# Altium PCB holoboard_mezzanine.PcbDoc
Units mil, origin at the board's own origin, x right, y up, seen from the top; angles counter-clockwise.
Board outline 511.81 x 511.81 mil, 2 copper layers (Top Layer, Bottom Layer); 17 components, 13 nets, 48 pads, 12 vias.
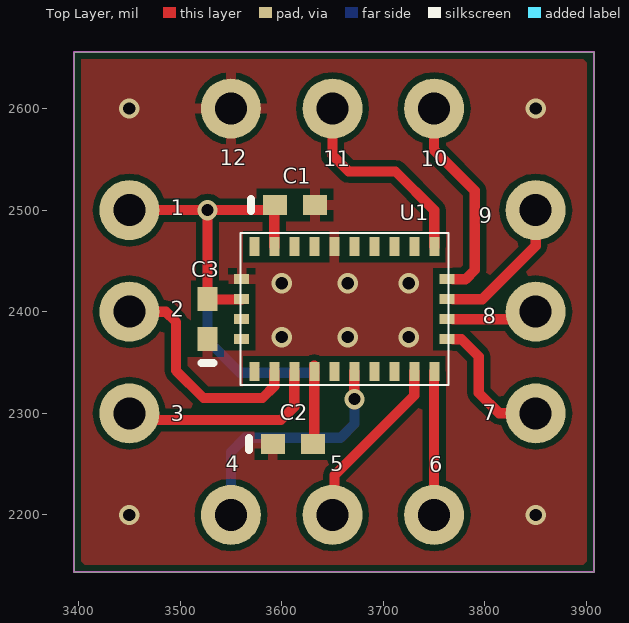
[diagram p0: Top Layer view]
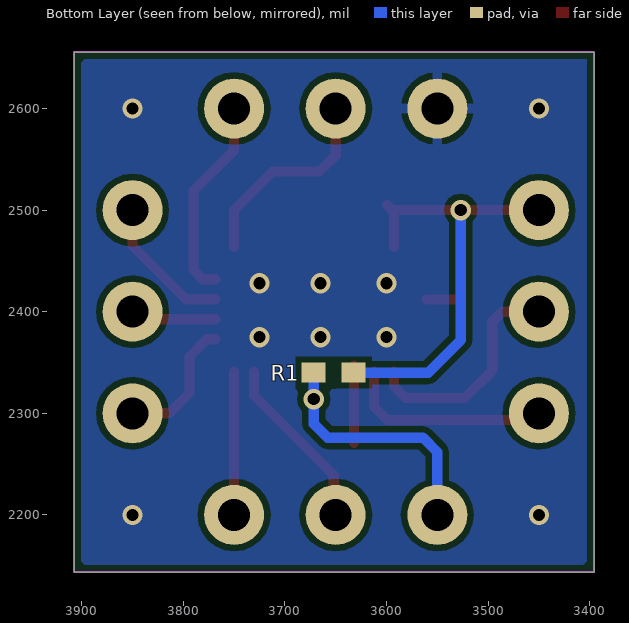
[diagram p1: Bottom Layer view, seen from below]
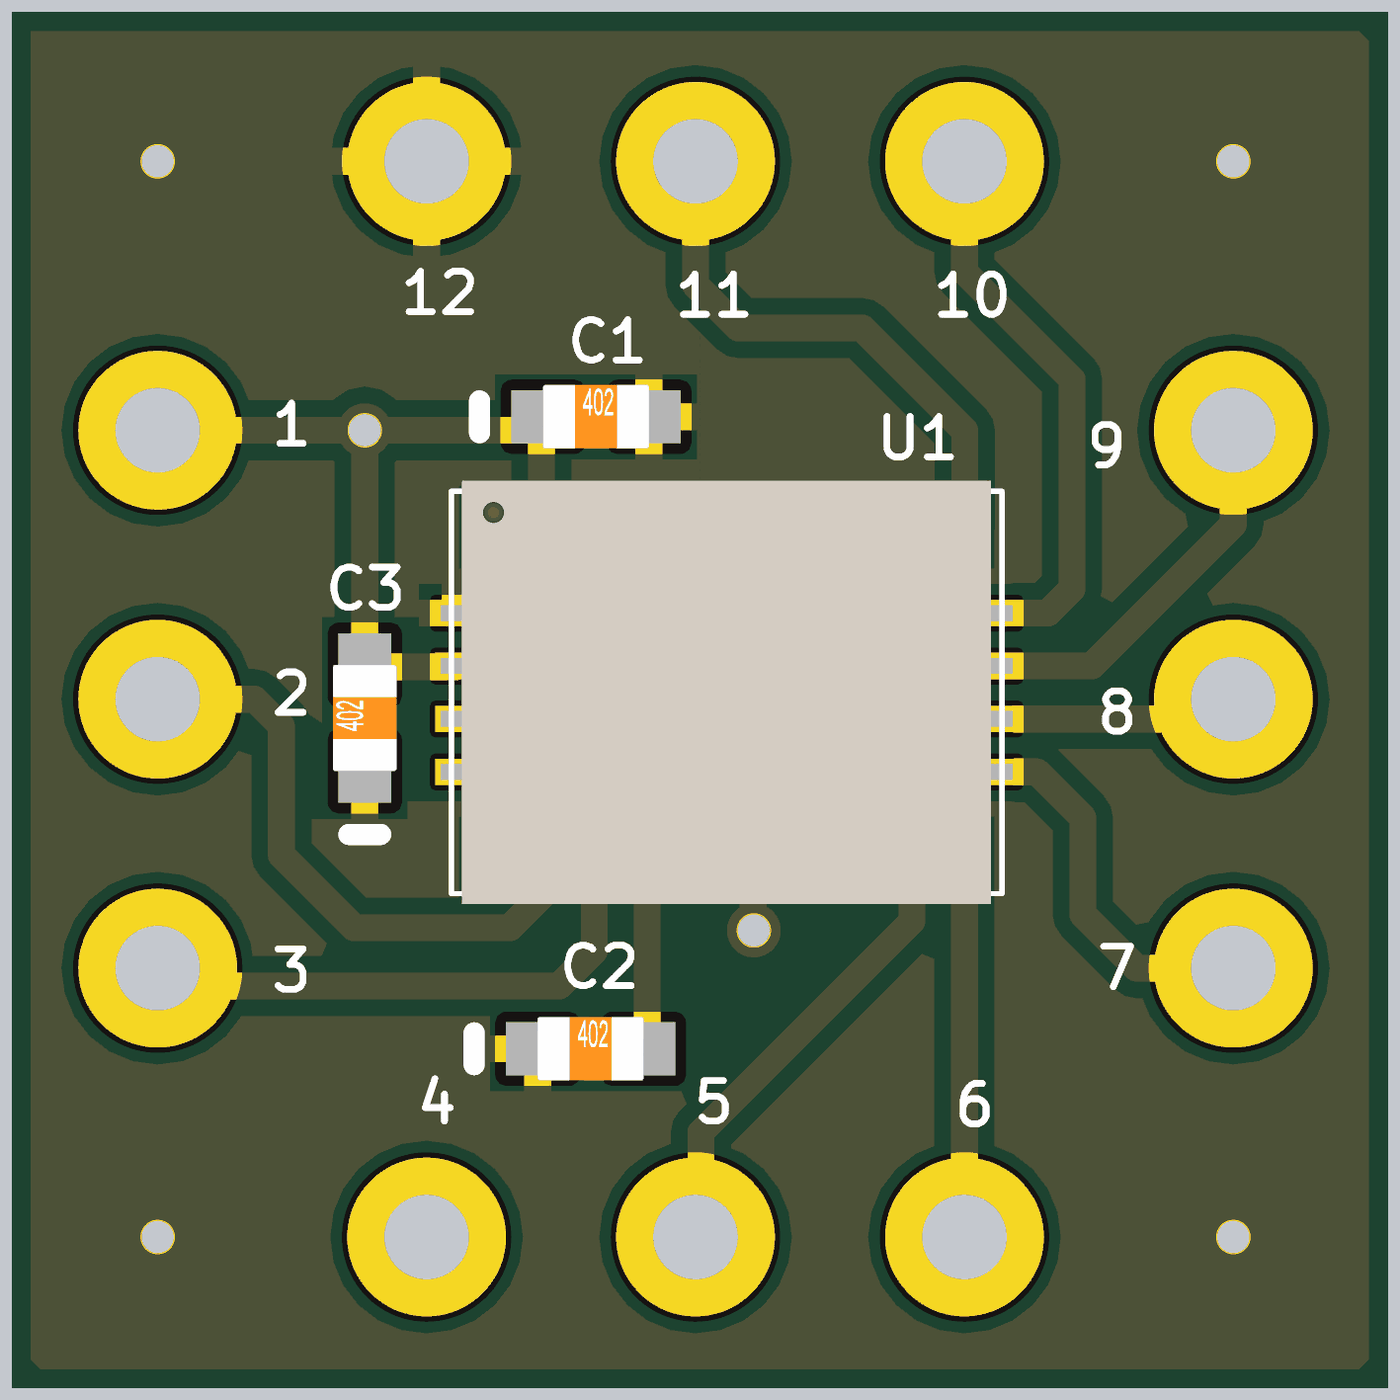
[diagram p2: 3D render of the assembled board from above, using the file's embedded part models]

## Layer stack, top to bottom
Top Layer: signal copper 1.4
Dielectric: dielectric 12.6, FR-4, Dk 4.8
Bottom Layer: signal copper 1.4

## Board outline
3395.67,2143.7 3907.48,2143.7 3907.48,2655.51 3395.67,2655.51

## Design rules (kind name [scope] priority, off if disabled: settings)
Clearance [All] p1: gap=6
HoleSize [All] p1: absolutevalues=TRUE maxlimit=100 minlimit=12 maxpercent=80.000 minpercent=20.000
PlaneConnect PlaneConnect_via [IsVia] p1: planeconnectstyle=Direct reliefexpansion=20 reliefentries=4 reliefconductorwidth=10 reliefairgap=10
PlaneConnect [All] p2: planeconnectstyle=Relief reliefexpansion=20 reliefentries=4 reliefconductorwidth=10 reliefairgap=10
PolygonConnect PolygonConnect_via [Isvia vs InNet('GND')] p1: connectstyle=Direct reliefconductorwidth=10 reliefentries=4 polygonreliefangle="90 Angle"
PolygonConnect [All] p2: connectstyle=Relief reliefconductorwidth=10 reliefentries=4 polygonreliefangle="90 Angle"
RoutingVias [All] p1: holewidth=28 width=50 viastyle="Through Hole" minholewidth=12 minwidth=50 maxholewidth=28 maxwidth=50
SilkscreenOverComponentPads [All] p1: minsilkscreentomaskgap=10
SolderMaskExpansion [All] p1: expansion=4
Width [All] p1: maxlimit=10 minlimit=6 preferedwidth=10
25 further rules are at their usual default settings.

## Components (designator, comment, footprint, x,y, rotation, side; value= is the part's Value field where it differs from the comment)
1 "Pad" PAD 3450,2500 r90 top
2 "Pad" PAD 3450,2400 r90 top
3 "Pad" PAD 3450,2300 r90 top
4 "Pad" PAD 3550,2200 r90 top
5 "Pad" PAD 3650,2200 r90 top
6 "Pad" PAD 3750,2200 r90 top
7 "Pad" PAD 3850,2300 r90 top
8 "Pad" PAD 3850,2400 r90 top
9 "Pad" PAD 3850,2500 r90 top
10 "Pad" PAD 3750,2600 r0 top
11 "Pad" PAD 3650,2600 r0 top
12 "Pad" PAD 3550,2600 r0 top
C1 "Cap" C0402 3613,2505 r0 top
C2 "Cap" C0402 3611,2270 r0 top
C3 "Cap" C0402 3527,2393 r90 top
R1 "Res2" 0402 3652,2340 r180 bottom
U1 "BMF055" LGA28 3573,2464 r180 top

## Footprints (in the part's own frame and the unit in brackets; to place one, negate y for a bottom-side part, rotate by r counter-clockwise, add the part's x,y. Pads: shape width x height; smd on the part's side, far side on the other; paste and mask are expansions set on the pad)
0402 [mm] "Chip Capacitor, Body 1.0x0.5mm, IPC High Density"
  rect 0.6x0.5 smd: 1(-0.5,0) 2(0.5,0)
  body extent -0.5,-0.25 0.5,0.25, height 0.3
C0402 [mm] "Chip Inductor, Body 1.0x0.5mm, IPC High Density"
  rect 0.6x0.5 smd: 1(-0.5,0) 2(0.5,0)
  silkscreen extent -1.1,-0.15 -1.1,0.15, body extent -0.5,-0.3 0.5,0.3, height 0.2
LGA28 [mm]
  rect 0.25x0.475 smd paste-0.05 mask+0.05: 1(0,0) 6(0,3.125) 7(-0.5,3.125) 8(-1,3.125) 9(-1.5,3.125) 10(-2,3.125) 11(-2.5,3.125) 12(-3,3.125) 13(-3.5,3.125) 14(-4,3.125) 15(-4.5,3.125) 20(-4.5,0) 21(-4,0) 22(-3.5,0) 23(-3,0) 24(-2.5,0) 25(-2,0) 26(-1.5,0) 27(-1,0) 28(-0.5,0)
  rect 0.375x0.25 smd paste-0.05 mask+0.05: 2(0.315,0.813) 3(0.315,1.313) 4(0.315,1.813) 5(0.315,2.313) 16(-4.815,2.312) 17(-4.815,1.812) 18(-4.815,1.312) 19(-4.815,0.812)
  silkscreen extent -4.85,-0.34 0.35,3.46, body extent -4.75,-0.44 0.25,3.56
PAD [mm]
  round 1.5 hole 0.8 paste-0.05 mask+0.05: 1(0,0)

## Part data
C1 C2 C3: "Capacitor"
R1: "Resistor"

## Via types
v1: diameter 20, hole 12, Top Layer to Bottom Layer, tented both sides, 12 vias

## Nets (pads, with @x,y where several pads share a name; then routed paths per layer and width w, separated by ;. In a path a pad name is that pad's centre, name@x,y a point inside that pad or via, vN(x,y) a via of type N, cw(c..) or ccw(c..) an arc to the next point about the centre after c; other vN are vias at no path point)
CS_IN: 6.1 U1.15 | length 141
  Top Layer w10: 6.1 U1.15@3750,2340.97
CS_OUT: 5.1 U1.14 | length 177.2
  Top Layer w10: 5.1@3661,2200 3652,2209 3652,2239 3730.48,2317.48 U1.14
GND: 12.1 C1.2 C2.1 C3.1 U1.2 U1.25
  other v1: 3450,2200 3850,2200 3600,2375 3665,2375 3725,2375 3600,2428 3665,2428 3725,2428 3450,2600 3850,2600
IRQ: 11.1 U1.20 | length 204.4
  Top Layer w10: 11.1 3650,2554 3666,2538 3712,2538 3750.17,2499.83 U1.20
MISO: 9.1 U1.18 | length 138.2
  Top Layer w10: U1.18@3768.57,2412.33 3797.33,2412.33 3850,2465 9.1
MOSI: 8.1 U1.17 | length 84.5
  Top Layer w10: U1.17@3768.57,2392.64 3842.64,2392.64 8.1
Net1_1: 1.1 C1.1 C3.2 R1.2 U1.3 U1.28 | length 554.5
  Top Layer w10: 1.1 v1(3527,2500) ; C3.2 v1(3527,2500) ; C3.2@3528,2412 U1.3@3560.6,2412 ; U1.28 3592.68,2498.37 C1.1@3594.31,2500 ; C1.1@3599.32,2505 C1.1@3594.31,2500 ; v1(3527,2500) C1.1@3594.31,2500
  Bottom Layer w10: v1(3527,2500) 3527,2372 3559,2340 R1.2
Net2_1: 2.1 U1.7 | length 225.1
  Top Layer w10: 2.1 3486,2400 3496,2390 3496,2342 3523,2315 3581,2315 3592.68,2326.68 U1.7
Net3_1: 3.1 U1.8 | length 205.1
  Top Layer w10: 3.1 3456.63,2293.37 3599.37,2293.37 3612.37,2306.37 U1.8
Net4_1: 4.1 R1.1 U1.11 | length 272.4
  Top Layer w10: v1@3671.43,2314 U1.11
  Bottom Layer w10: 4.1 3550,2262 3564,2276 3658,2276 3671.68,2289.68 R1.1
  other v1: 3671.68,2314
NetC2_2: C2.2 U1.9 | length 76
  Top Layer w10: C2.2@3632.06,2271 U1.9@3632.06,2346.97
REQUEST: 10.1 U1.19 | length 200.7
  Top Layer w10: 10.1 3750,2559 3790,2519 3790,2441 3781.01,2432.01 U1.19@3768.57,2432.01
SCLK: 7.1 U1.16 | length 132.7
  Top Layer w10: U1.16@3768.57,2372.96 3777,2372.96 3794,2355.96 3794,2320 3814,2300 7.1
pads on no net: U1.1 U1.4 U1.5 U1.6 U1.10 U1.12 U1.13 U1.21 U1.22 U1.23 U1.24 U1.26 U1.27

## Polygon pours and split planes (outlines as drawn)
GND on Bottom Layer "Bot GND" (solid, remove dead copper, pour order 2): 3395.67,2655.51 3907.48,2655.51 3907.48,2143.7 3395.67,2143.7
GND on Top Layer "Top GND" (solid, remove dead copper, pour order 4): 3395.67,2655.51 3907.48,2655.51 3907.48,2143.7 3395.67,2143.7

## Keep-outs
Keep-Out Layer:
  the board outline again, w1.97

## Dimensions
3395.67,2655.51 to 3907.48,2655.51 on Drill Drawing
3907.48,2655.51 to 3907.48,2143.7 on Drill Drawing